# Altium PCB HoverBall_power.PcbDoc
Units mm, origin at the board's own origin, x right, y up, seen from the top; angles counter-clockwise.
Board outline 30 x 30 mm, 2 copper layers (Top Layer, Bottom Layer); 13 components, 8 nets, 40 pads, 17 vias.
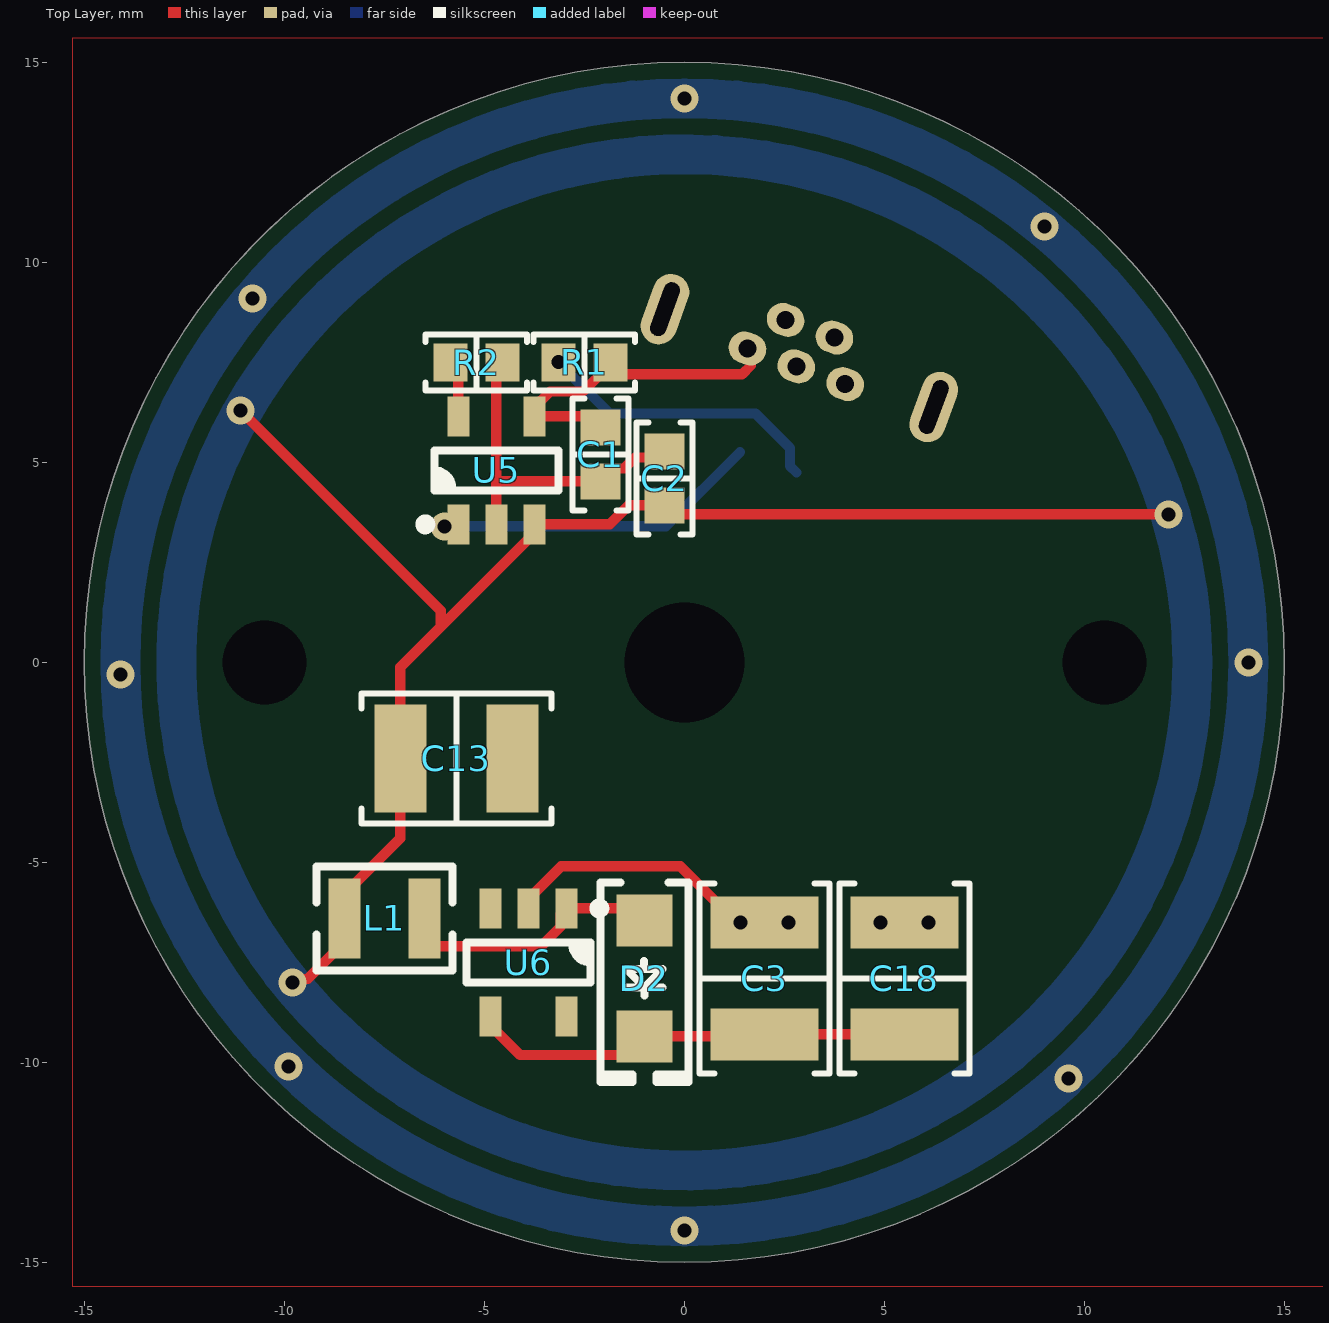
[diagram p0: Top Layer view]
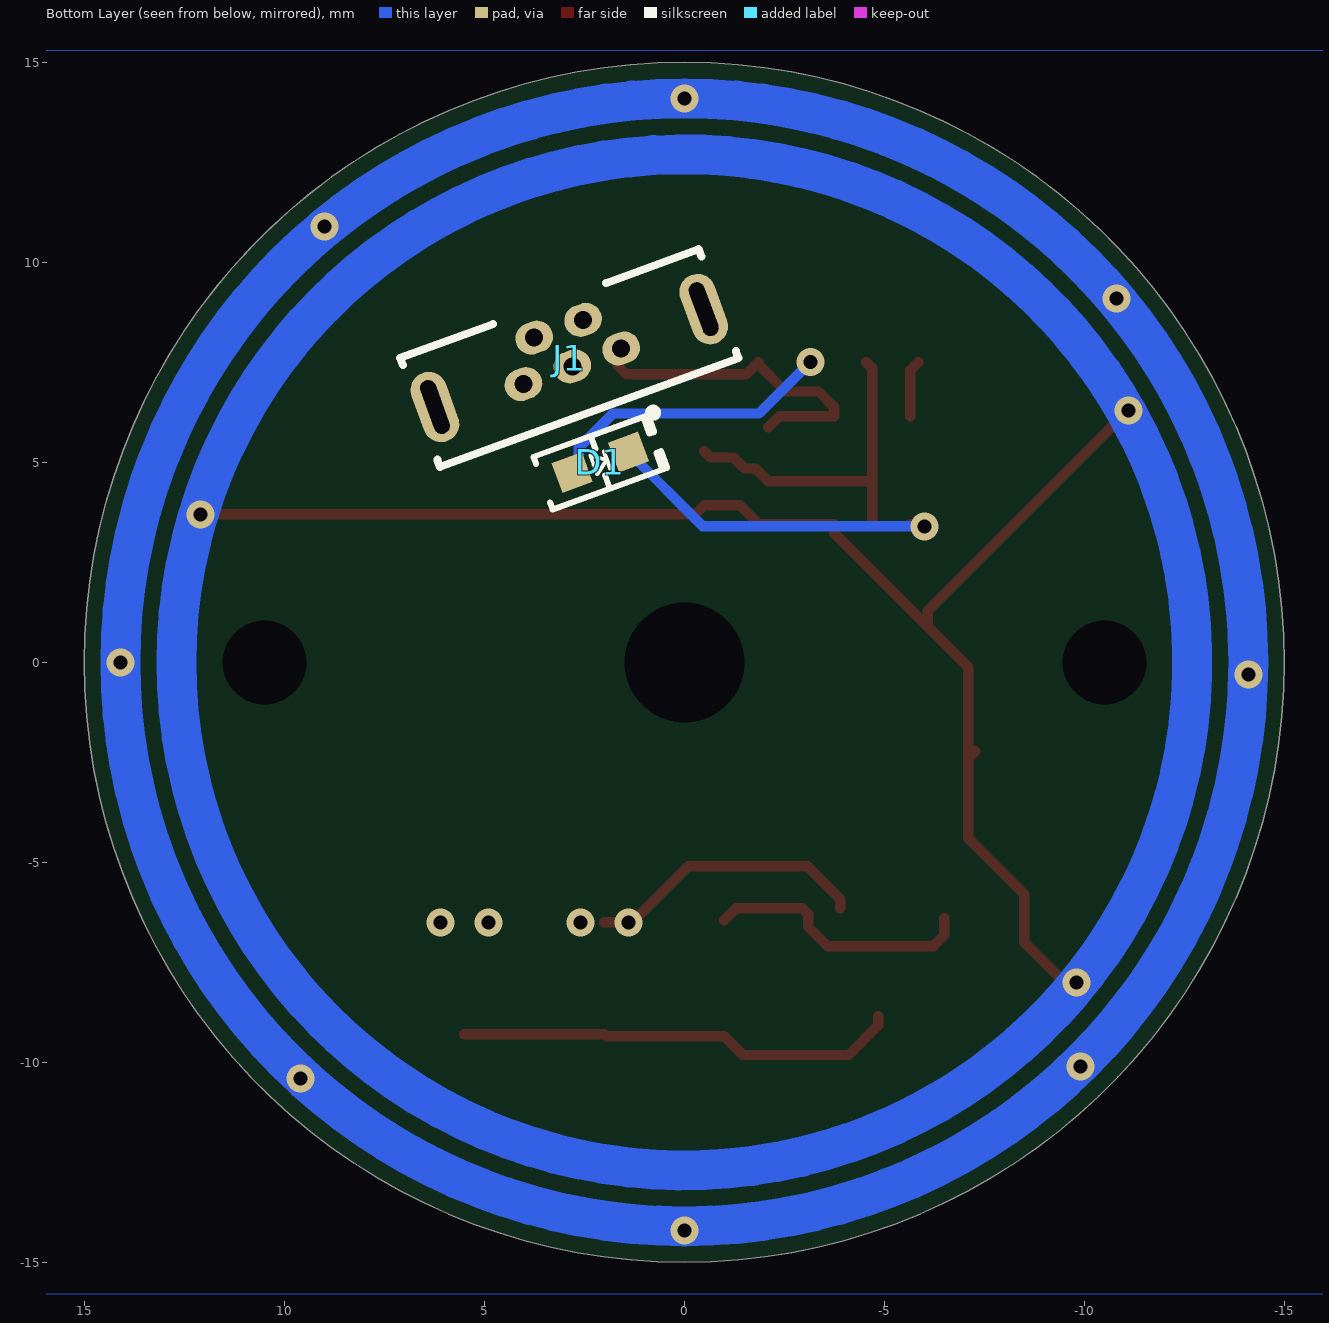
[diagram p1: Bottom Layer view, seen from below]
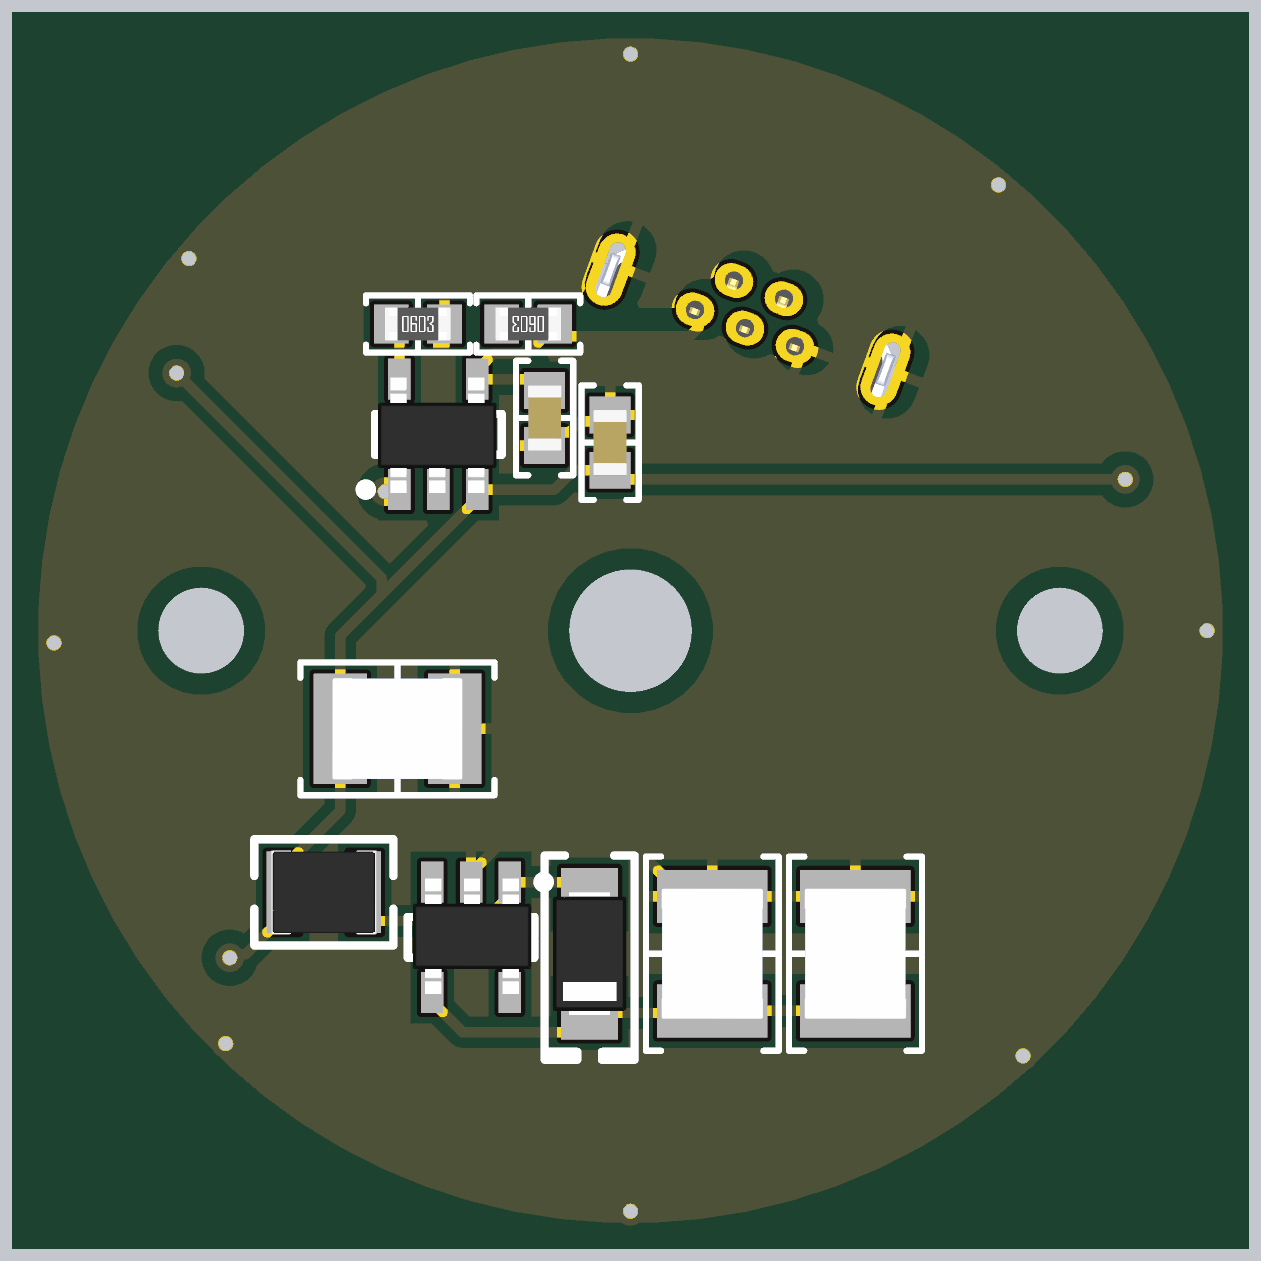
[diagram p2: 3D render of the assembled board from above, using the file's embedded part models]

## Layer stack, top to bottom
Top Solder: solder mask 0.01, Solder Resist, Dk 3.5
Top Layer: signal copper 0.035
Dielectric2: dielectric 0.32, FR-4, Dk 4.8
Bottom Layer: signal copper 0.035
Bottom Solder: solder mask 0.01, Solder Resist, Dk 3.5

## Board outline
0,-15 cw(c0,0) -15,0 cw(c0,0) 0,15 cw(c0,0) 15,0 cw(c0,0)

## Design rules (kind name [scope] priority, off if disabled: settings)
BoardOutlineClearance [All] p1: gap=0.254 ignorepadtopadclearanceinfootprint=FALSE except(0: Arc-SplitContinuation Track-SplitContinuation SMDPad-SplitContinuation THPad-SplitContinuation Via-SplitContinuation Fill-SplitContinuation Poly-SplitContinuation Region-SplitContinuation Text-SplitContinuation; 0.512: Poly-OutlineEdge Poly-CavityEdge Poly-CutoutEdge Poly-SplitBarrior)
Clearance "PolyGon Pour Clearance" [InPolygon] p1: gap=0.254 ignorepadtopadclearanceinfootprint=FALSE except(0.512: Arc-Hole Track-Hole SMDPad-Hole THPad-Hole Via-Hole Fill-Hole Poly-Hole Region-Hole Text-Hole)
Clearance [All] p2: gap=0.152 ignorepadtopadclearanceinfootprint=FALSE except(0.01: Text-Text; 0.127: Arc-Arc Arc-Track Arc-SMDPad Track-Track Track-SMDPad SMDPad-SMDPad; 0.2: Arc-THPad Arc-Fill Arc-Poly Arc-Region Arc-Hole Track-THPad Track-Fill Track-Poly Track-Region Track-Hole; 0.254: Arc-Via Track-Via Via-Via; 0.54: THPad-THPad)
HoleSize [All] p1: absolutevalues=TRUE maxlimit=6.3 minlimit=0.2 maxpercent=80.000 minpercent=20.000
HoleToHoleClearance [All] p1: gap=0.54 allowstackedmicrovias=TRUE
PlaneClearance [All] p1: clearance=0.1
PolygonConnect PolygonDirect [(IsNamedPolygon('PolygonDirect'))] p1: connectstyle=Direct reliefconductorwidth=0.254 reliefentries=4 polygonreliefangle="90 Angle" airgapwidth=0.254
PolygonConnect [IsPolygon and not (IsNamedPolygon('PolygonDirect'))] p2: thpad.connectstyle=Relief thpad.reliefconductorwidth=0.254 thpad.reliefentries=4 thpad.polygonreliefangle="90 Angle" thpad.airgapwidth=0.254 smdpad.connectstyle=Relief smdpad.reliefconductorwidth=0.254 smdpad.reliefentries=4 smdpad.polygonreliefangle="90 Angle" smdpad.airgapwidth=0.254 via.connectstyle=Direct via.reliefconductorwidth=0.254 via.reliefentries=4 via.polygonreliefangle="90 Angle" via.airgapwidth=0.254
RoutingVias [All] p1: holewidth=0.35 width=0.7 viastyle="Through Hole" minholewidth=0.3 minwidth=0.6 maxholewidth=0.5 maxwidth=10
SolderMaskExpansion [All] p1: expansion=0.102 istentingtop=FALSE
Width [All] p1: maxlimit=2 minlimit=0.127 preferedwidth=0.254
27 further rules are at their usual default settings.

## Components (designator, comment, footprint, x,y, rotation, side; value= is the part's Value field where it differs from the comment)
C1 "4.7µF" "CAP 0603_1608" -2.1,5.2 r270 top
C2 "4.7µF" "CAP 0603_1608" -0.5,4.6 r90 top
C3 "22µF" "CAP 1210_3225 - 2.8MM" 2,-7.9 r270 top
C13 "100µF" "CAP 1210_3225 - 2.8MM" -5.7,-2.4 r180 top
C18 "100µF" "CAP 1210_3225 - 2.8MM" 5.5,-7.9 r270 top
D1 "Red" "LED 0603_1608 RED" 2.1,5 r160 bottom
D2 "V1F6-M3/H" "SMF DO-219AB" -1,-7.9 r270 top
J1 "Mirco USB port" GCT_USB3131-30-0230-A_REVB 2.875,7.607 r340 bottom
L1 "2.2uH" "TAIYO YUDEN MAMK2520T1R0M" -7.5,-6.4 r0 top value=470nH
R1 "540" "RES 0603_1608" -2.5,7.5 r180 top
R2 "5k" "RES 0603_1608" -5.2,7.5 r0 top
U5 "Lipo charger" "TI SOT-23-5 DBV" -4.7,4.8 r90 top
U6 "Buck Boost 5V" "TI SOT-23-5 DBV" -3.9,-7.5 r270 top

## Footprints (in the part's own frame and the unit in brackets; to place one, negate y for a bottom-side part, rotate by r counter-clockwise, add the part's x,y. Pads: shape width x height; smd on the part's side, far side on the other; paste and mask are expansions set on the pad)
"CAP 0603_1608" [mm] "Chip Capacitor, 2-Leads, Body 1.60x0.80mm, IPC Medium Density"
  rect 0.9x1 smd: 1(-0.675,0) 2(0.675,0)
  silkscreen extent -1.4,-0.7 1.4,0.7, body extent -0.8,-0.41 0.8,0.41, height 0.82
"CAP 1210_3225 - 2.8MM" [mm] "Chip Capacitor, 2-Leads, Body 3.20x2.50mm, IPC Medium Density"
  rect 1.3x2.7 smd: 1(-1.4,0) 2(1.4,0)
  silkscreen extent -2.37,-1.63 2.37,1.63, body extent -1.6,-1.25 1.6,1.25, height 2.8
GCT_USB3131-30-0230-A_REVB [mm]
  oval 0.95x0.8 hole 0.45: 1(-1.3,0.22) 2(-0.65,-0.78) 3(0,0.22) 4(0.65,-0.78) 5(1.3,0.22)
  oval 0.908x1.816 hole 0.4 slot 1.4 at 90 deg: S1(-3.575,0) S2(3.575,0)
  silkscreen extent -3.97,-1.45 3.97,2.1, body extent -3.97,-1.42 3.97,1.42, height 5.6
"LED 0603_1608 RED" [mm] "Chip Diode, 2-Leads, Body 1.60x0.80mm, IPC Medium Density"
  rect 0.8x0.8 smd: 1(-0.75,0) 2(0.75,0)
  silkscreen extent -1.52,-0.7 1.52,0.7, body extent -0.8,-0.4 0.8,0.4, height 0.53
"RES 0603_1608" [mm] "Chip Resistor, 2-Leads, Body 1.60x0.80mm, IPC Medium Density"
  rect 0.85x0.95 smd: 1(-0.65,0) 2(0.65,0)
  silkscreen extent -1.27,-0.7 1.27,0.7, body extent -0.8,-0.4 0.8,0.4, height 0.45
"SMF DO-219AB" [mm] "Molded Diode, 2-Leads, Body 3.90x1.90mm, IPC Medium Density"
  rect 1.3x1.4 smd: 1(-1.45,0) 2(1.45,0)
  silkscreen extent -2.4,-1.1 2.59,1.1, body extent -1.5,-0.9 1.5,0.9, height 1.18
"TAIYO YUDEN MAMK2520T1R0M" [mm] "Inductor, 2-Leads, Body 2.50x2.00mm, IPC Medium Density"
  rect 0.8x2 smd: 1(-1,0) 2(1,0)
  silkscreen extent -1.7,-1.3 1.7,1.3, body extent -1.3,-1.02 1.3,1.03, height 1.2
"TI SOT-23-5 DBV" [mm] "SOT23, 5-Leads, Body 2.90x2.80mm, Pitch 0.95mm, IPC Medium Density"
  rect 1x0.55 smd: 1(-1.35,0.95) 2(-1.35,0) 3(-1.35,-0.95) 4(1.35,-0.95) 5(1.35,0.95)
  silkscreen extent -1.47,-1.55 0.5,1.9, body extent -1.44,-1.42 1.39,1.48, height 1.5

## Part data
C1 C2: library part GCG188R92A104KA03D, "CAP CER 0.1UF 100V 0603 EPOXY", Capacitance=0.1µF, Device Package="0603 (1608 Metric)", Manufacturer="Murata Electronics", Operating Temperature="-55°C ~ 150°C", Ratings=AEC-Q200, Supplier Part Number 1=490-18197-1-ND, Temperature Coefficient=X8R, Tolerance=±10%, Voltage - Rated=100V, Applications=Automotive, ComponentLink1Description=Datasheet, ComponentLink1URL=https://search.murata.co.jp/Ceramy/image/img/A01X/G101/ENG/GCG188R92A104KA03-01.pdf, ComponentLink2Description="DigiKey Link", ComponentLink2URL=http://digikey.com/product-detail/en/murata-electronics/GCG188R92A104KA03D/490-18197-1-ND/9867926, Features="Epoxy Mountable", LastUpdated="21-Jan-20 12:01:59 AM", Lifecycle Status=Active, Minimum Order=1, Mounting Type="Surface Mount, MLCC, Epoxy", Package / Case="0603 (1608 Metric)", Packaging=TapeAndReel, Part Number=GCG188R92A104KA03D, Part Status=Active, PartId=9025, Price=0.07, Series=GCG, Size / Dimension="0.063\" L x 0.031\" W (1.60mm x 0.80mm)", Supplier 1=DigiKey, Thickness (Max)="0.035\" (0.90mm)"
C3: library part EMK325ABJ107MM-P, "CAP CER 100UF 16V X5R 1210", Capacitance=100µF, Device Package="1210 (3225 Metric)", Manufacturer="Taiyo Yuden", Operating Temperature="-55°C ~ 85°C", Supplier Part Number 1=587-5426-1-ND, Temperature Coefficient=X5R, Tolerance=±20%, Voltage - Rated=16V, Applications="General Purpose", ComponentLink1Description=Datasheet, ComponentLink1URL="https://ds.yuden.co.jp/TYCOMPAS/ut/detail?pn=EMK325ABJ107MM-P &u=M", ComponentLink2Description="DigiKey Link", ComponentLink2URL=http://digikey.com/product-detail/en/taiyo-yuden/EMK325ABJ107MM-P/587-5426-1-ND/7067102, LastUpdated="21-Jan-20 12:30:21 AM", Lifecycle Status=Active, Minimum Order=1, Mounting Type="Surface Mount, MLCC", Package / Case="1210 (3225 Metric)", Packaging=TapeAndReel, Part Number=EMK325ABJ107MM-P, Part Status=Active, PartId=24141, Price=0.71, Series=M, Size / Dimension="0.126\" L x 0.098\" W (3.20mm x 2.50mm)", Supplier 1=DigiKey, Thickness (Max)="0.110\" (2.80mm)"
C13 C18: library part EMK325ABJ107MM-P, "CAP CER 100UF 16V X5R 1210", Device Package="1210 (3225 Metric)", Manufacturer="Taiyo Yuden", Operating Temperature="-55°C ~ 85°C", Supplier Part Number 1=587-5426-1-ND, Temperature Coefficient=X5R, Tolerance=±20%, Voltage - Rated=16V, Applications="General Purpose", Capacitance=100µF, ComponentLink1Description=Datasheet, ComponentLink1URL="https://ds.yuden.co.jp/TYCOMPAS/ut/detail?pn=EMK325ABJ107MM-P &u=M", ComponentLink2Description="DigiKey Link", ComponentLink2URL=http://digikey.com/product-detail/en/taiyo-yuden/EMK325ABJ107MM-P/587-5426-1-ND/7067102, LastUpdated="21-Jan-20 12:30:21 AM", Lifecycle Status=Active, Minimum Order=1, Mounting Type="Surface Mount, MLCC", Package / Case="1210 (3225 Metric)", Packaging=TapeAndReel, Part Number=EMK325ABJ107MM-P, Part Status=Active, PartId=24141, Price=0.71, Series=M, Size / Dimension="0.126\" L x 0.098\" W (3.20mm x 2.50mm)", Supplier 1=DigiKey, Thickness (Max)="0.110\" (2.80mm)"
D1: library part 5973005507F, "LED RED 0603 SMD", Current - Test=20mA, Device Package="0603 (1608 Metric)", Lens Color=0.68mm, Manufacturer=Dialight, Millicandela Rating=90mcd, Supplier Device Package=0603, Supplier Part Number 1=350-4374-1-ND, Voltage - Forward (Vf) (Typ)=2V, Color=Red, ComponentLink1Description=Datasheet, ComponentLink1URL=http://www.dialightsignalsandcomponents.com/Assets/Drawings/2D_Drawings_DrawingDetailedSpec/NewDrawings/18369A.pdf, ComponentLink2Description="DigiKey Link", ComponentLink2URL=http://digikey.com/product-detail/en/dialight/5973005507F/350-4374-1-ND/9385480, Configuration=Standard, Height (Max)=0.68mm, LastUpdated="9/2/2020 1:20:57 AM", Lens Size="1.20mm x 0.80mm", Lens Style="Rectangle with Flat Top", Lifecycle Status=Active, Minimum Order=1, Mounting Type="Surface Mount", Package / Case="0603 (1608 Metric)", Packaging=TapeAndReel, Part Number=5973005507F, Part Status=Active, PartId=378, Price=0.11, Series=597, Size / Dimension="1.60mm L x 0.80mm W", Supplier 1=DigiKey, Wavelength - Dominant=630nm
D2: "1A 60V SMF TRENCH SKY RECT", Capacitance @ Vr, F="135pF @ 4V, 1MHz", Current - Average Rectified (Io)=1A, Current - Reverse Leakage @ Vr="270µA @ 60V", Manufacturer="Vishay Semiconductor Diodes Division", Operating Temperature - Junction="-40°C ~ 150°C", Package / Case=DO-219AB, Supplier Device Package="DO-219AB (SMF)", Supplier Part Number 1=112-V1F6-M3/HCT-ND, Voltage - DC Reverse (Vr) (Max)=60V, Voltage - Forward (Vf) (Max) @ If="600mV @ 1A", ComponentLink1Description=Datasheet, ComponentLink1URL=http://www.vishay.com/docs/87555/v1f6.pdf, ComponentLink2Description="DigiKey Link", ComponentLink2URL=http://digikey.com/product-detail/en/vishay-semiconductor-diodes-division/V1F6-M3-H/112-V1F6-M3-HCT-ND/10660586, Diode Type=Schottky, LastUpdated="02-Sep-20 1:23:13 AM", Lifecycle Status=Active, Minimum Order=1, Mounting Type="Surface Mount", Packaging=Unknown, Part Number=V1F6-M3/H, Part Status=Active, PartId=3272, Price=0.07, Series="eSMP®, TMBS®", Speed="Fast Recovery =< 500ns, > 200mA (Io)", Supplier 1=DigiKey
J1: library part USB3131-30-0230-A, "USB - micro B USB 2.0 Receptacle Connector 5 Position Through Hole", Package=None, Availability=Unavailable, MF="Amphenol ICC", MP=10118194-0001LF, Price=None, SnapEDA_Link=https://www.snapeda.com/parts/10118194-0001LF/Amphenol%20FCI/view-part/1413308/?ref=snap
L1: library part MAKK2520TR47M, "FIXED IND 470NH 3.2A 46 MOHM SMD", Current - Saturation=3.9A, Current Rating (Amps)=3.2A, DC Resistance (DCR)="46mOhm Max", Device Package="1008 (2520 Metric)", Inductance=470nH, Inductance Frequency - Test=2MHz, Manufacturer="Taiyo Yuden", Operating Temperature="-40°C ~ 105°C", Supplier Part Number 1=587-4145-1-ND, Tolerance=±20%, ComponentLink1Description=Datasheet, ComponentLink1URL="https://ds.yuden.co.jp/TYCOMPAS/ut/detail?pn=MAKK2520TR47M  &u=M", ComponentLink2Description="DigiKey Link", ComponentLink2URL=http://digikey.com/product-detail/en/taiyo-yuden/MAKK2520TR47M/587-4145-1-ND/5035305, Height - Seated (Max)="0.039\" (1.00mm)", LastUpdated="9/2/2020 1:22:11 AM", Lifecycle Status=Active, Material - Core=Metal, Minimum Order=1, Mounting Type="Surface Mount", Package / Case="1008 (2520 Metric)", Packaging=TapeAndReel, Part Number=MAKK2520TR47M, Part Status=Active, PartId=69, Price=0.09, Series="MCOIL™, MA", Shielding=Shielded, Size / Dimension="0.098\" L x 0.079\" W (2.50mm x 2.00mm)", Supplier 1=DigiKey, Supplier Device Package="1008 (2520 Metric)", Type=Wirewound
R1 R2: library part RNCS0603BKE10K0, "RES 10K OHM 0.1% 1/16W 0603", Device Package="0603 (1608 Metric)", Manufacturer="Stackpole Electronics Inc", Operating Temperature="-55°C ~ 155°C", Power (Watts)="0.063W, 1/16W", Ratings=AEC-Q200, Resistance="10 kOhms", Supplier Device Package=0603, Supplier Part Number 1=RNCS0603BKE10K0CT-ND, Temperature Coefficient=±25ppm/°C, Tolerance=±0.1%, ComponentLink1Description=Datasheet, ComponentLink1URL=https://www.seielect.com/catalog/sei-rncs_rnch.pdf, ComponentLink2Description="DigiKey Link", ComponentLink2URL=http://digikey.com/product-detail/en/stackpole-electronics-inc/RNCS0603BKE10K0/RNCS0603BKE10K0CT-ND/1800113, Composition="Thin Film", Features="Anti-Corrosive, Automotive AEC-Q200, Moisture Resistant", Height - Seated (Max)="0.022\" (0.55mm)", LastUpdated="21-Jan-20 12:25:01 AM", Lifecycle Status=Active, Minimum Order=1, Number of Terminations=2, Package / Case="0603 (1608 Metric)", Packaging=TapeAndReel, Part Number=RNCS0603BKE10K0, Part Status=Active, PartId=4838, Price=0.08, Series=RNCS, Size / Dimension="0.061\" L x 0.031\" W (1.55mm x 0.80mm)", Supplier 1=DigiKey
U5: library part MCP73831
U6: library part TPS613222A, "ADJ step down Buck"

## Free pads (board coordinates)
  round 0 hole 2.1 unplated: 1(-10.5,0) 1(10.5,0)
  round 0 hole 3 unplated: 1(0,0)

## Via types
v1: diameter 0.7, hole 0.35, Top Layer to Bottom Layer, tented both sides, 17 vias

## Nets (pads, with @x,y where several pads share a name; then routed paths per layer and width w, separated by ;. In a path a pad name is that pad's centre, name@x,y a point inside that pad or via, vN(x,y) a via of type N, cw(c..) or ccw(c..) an arc to the next point about the centre after c; other vN are vias at no path point)
5V: C3.2 C18.2 D2.2 U6.4 | length 11.1
  Top Layer w0.254: U6.4 -4.85,-9.075 -4.104,-9.821 -1.471,-9.821 D2.2 1.95,-9.35 C3.2 C18.2
GND: C1.2 C2.2 C3.1 C13.1 C18.1 J1.5 J1.S1 J1.S2 R2.2 U5.2 U6.2 | length 104.3
  Top Layer w0.254: U5.2 -4.7,4.5 ; R2.2 -4.7,7.35 -4.7,4.5 ; U6.2 -3.9,-5.925 -3.075,-5.1 -0.1,-5.1 1.3,-6.5 C3.1 ; C2.2 -0.657,5.118 -1.232,5.118 -1.502,4.848 -1.777,4.848 C1.2 -4.675,4.525 -4.7,4.5
  Bottom Layer w1: v1(14.1,0) ccw(c0,0) v1(14.1,0)
  other v1: 0,-14.2 9.6,-10.4 -9.9,-10.1 1.4,-6.5 2.6,-6.5 4.9,-6.5 6.1,-6.5 -14.1,-0.3 -10.8,9.1 9,10.9 0,14.1
NetD1_1: D1.1 R1.2 | length 7.4
  Bottom Layer w0.254: v1(-3.15,7.502) -1.871,6.223 1.777,6.223 2.639,5.361 2.639,4.909 D1.1
NetD1_2: D1.2 U5.1 | length 8.5
  Top Layer w0.254: v1(-6,3.4) -5.7,3.4 U5.1
  Bottom Layer w0.254: v1(-6,3.4) -0.461,3.4 D1.2
NetD2_1: D2.1 L1.2 U6.1 | length 6.7
  Top Layer w0.254: L1.2 -6.5,-6.827 -6.227,-7.1 -3.581,-7.1 -3.098,-6.617 -3.098,-6.298 U6.1 -1.3,-6.15 D2.1
NetR2_1: R2.1 U5.5 | length 1.4
  Top Layer w0.254: R2.1 -5.65,7.3 U5.5
VBAT: C2.1 C13.2 L1.1 U5.3 | length 117.8
  Top Layer w0.254: v1(-11.1,6.3) -6.088,1.288 -6.088,0.888 ; v1(-9.8,-8) -9.715,-7.915 -9.415,-7.915 -8.5,-7 L1.1 -8.5,-5.8 -7.1,-4.4 C13.2 ; C13.2@-7.275,-2.225 C13.2 ; v1(12.1,3.7) -0.275,3.7 C2.1 -1.391,3.925 -1.866,3.45 U5.3 -3.75,3.225 -6.088,0.888 ; C13.2 -7.1,-0.125 -6.088,0.888
  Bottom Layer w1: 12.7,0 ccw(c0,0) 12.7,0
VUSB: C1.1 J1.1 R1.1 U5.4 | length 8.6
  Top Layer w0.254: C1.1 -2.375,6.15 U5.4 -3.75,6.375 -3.354,6.771 -2.529,6.771 -1.85,7.45 R1.1 -1.85,7.498 -1.552,7.2 1.446,7.2 1.666,7.42 1.666,7.757 J1.1
pads on no net: J1.2 J1.3 J1.4 U6.3 U6.5

## Polygon pours and split planes (outlines as drawn)
GND on Bottom Layer "Bot gnd" (solid, shelved, pour order 73): -17.4,15.3 -17.4,-15.8 16.8,-15.8 16.8,15.3
GND on Top Layer "Top gnd" (solid, shelved, pour order 74): -15.3,15.6 -15.3,-15.6 16,-15.6 16,15.6

## Silkscreen, mask and mechanical layers (free items; w line width, h text height)
Bottom Solder:
  circle w3: c0,0 r13.5
Board Outline:
  circle w0.254: c0,0 r15